# Altium PCB HW_ADHERENT_NFC_R1.PcbDoc
Units mm, origin at the board's own origin, x right, y up, seen from the top; angles counter-clockwise.
Board outline 60 x 46 mm, 4 copper layers (Top Layer, Int1 (GND), Int2 (PWR), Bottom Layer), stack 1.369 mm thick; 115 components, 65 nets, 328 pads, 0 vias.
Unrouted connection lines stored in the file: 235.
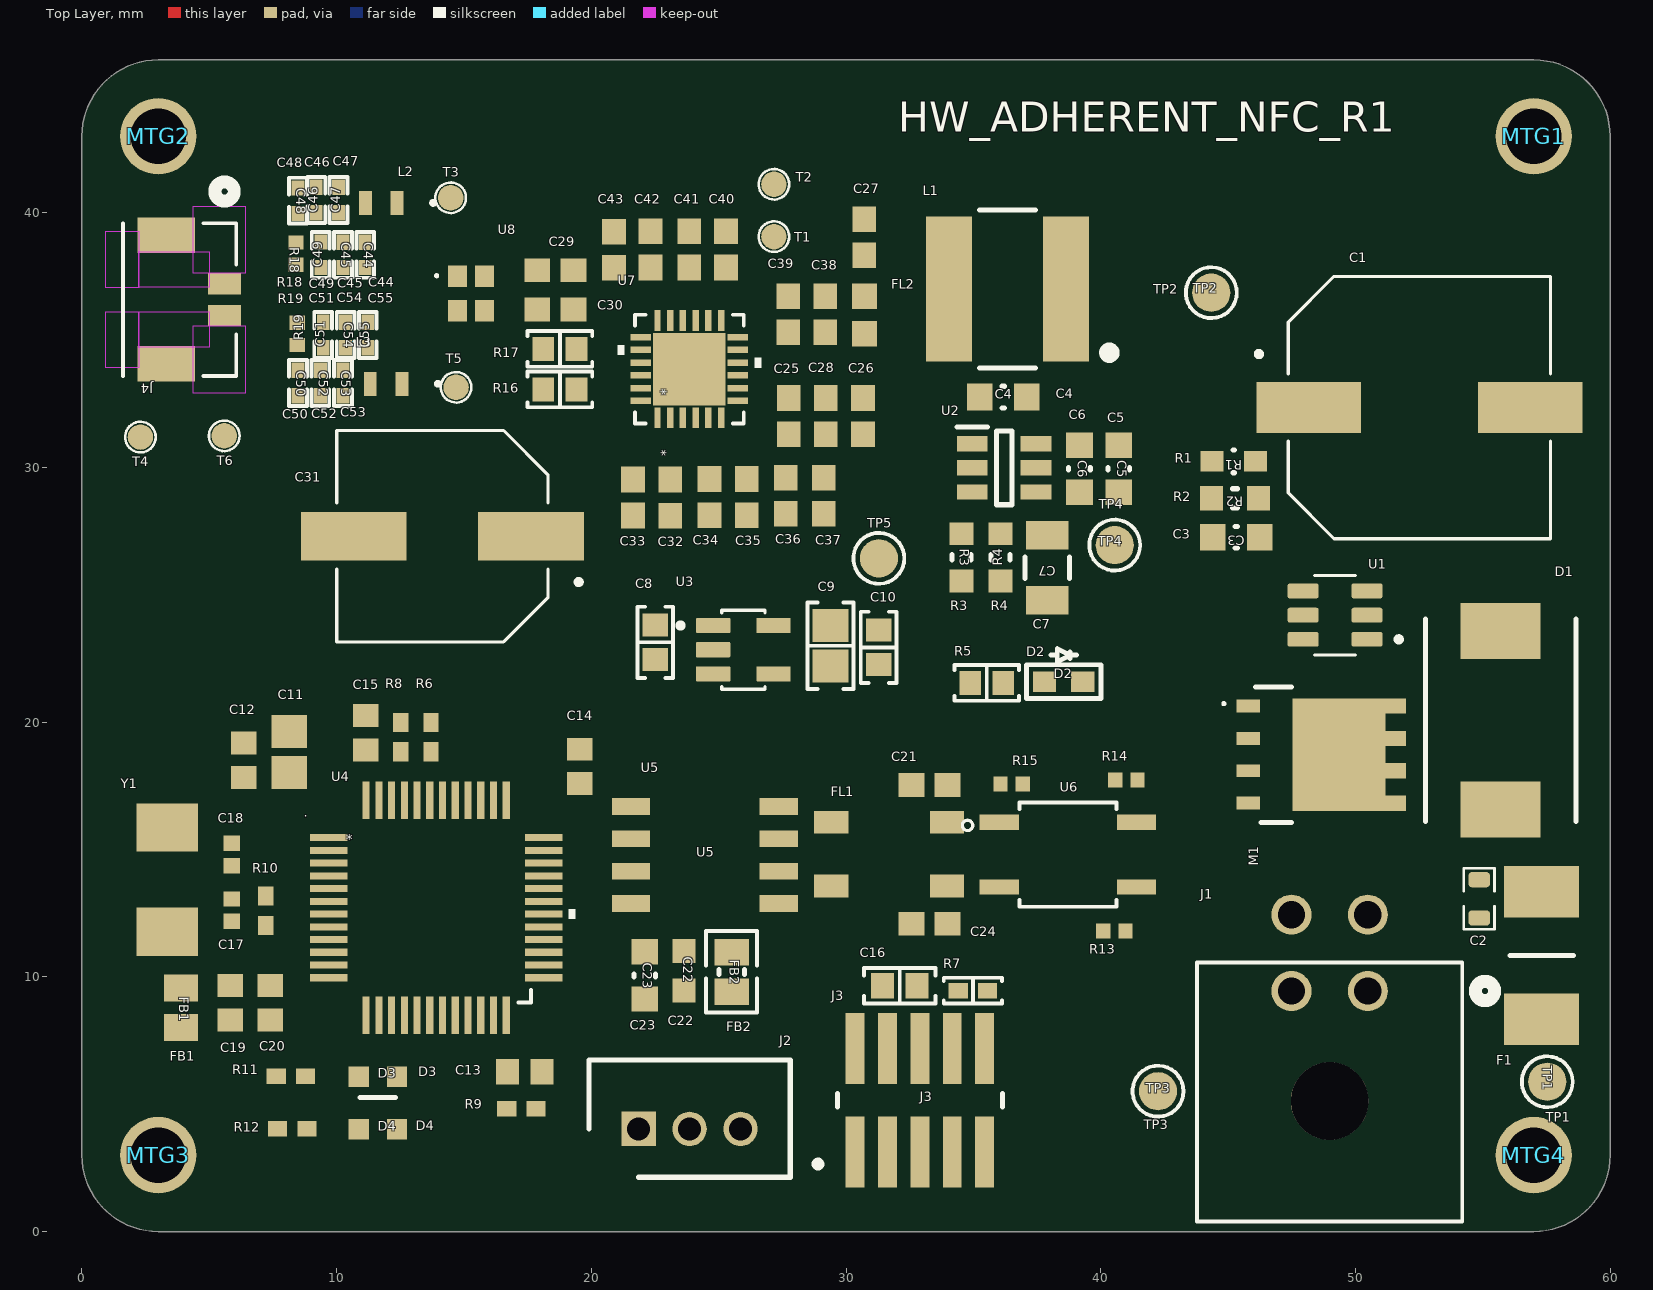
[diagram p0: Top Layer view]
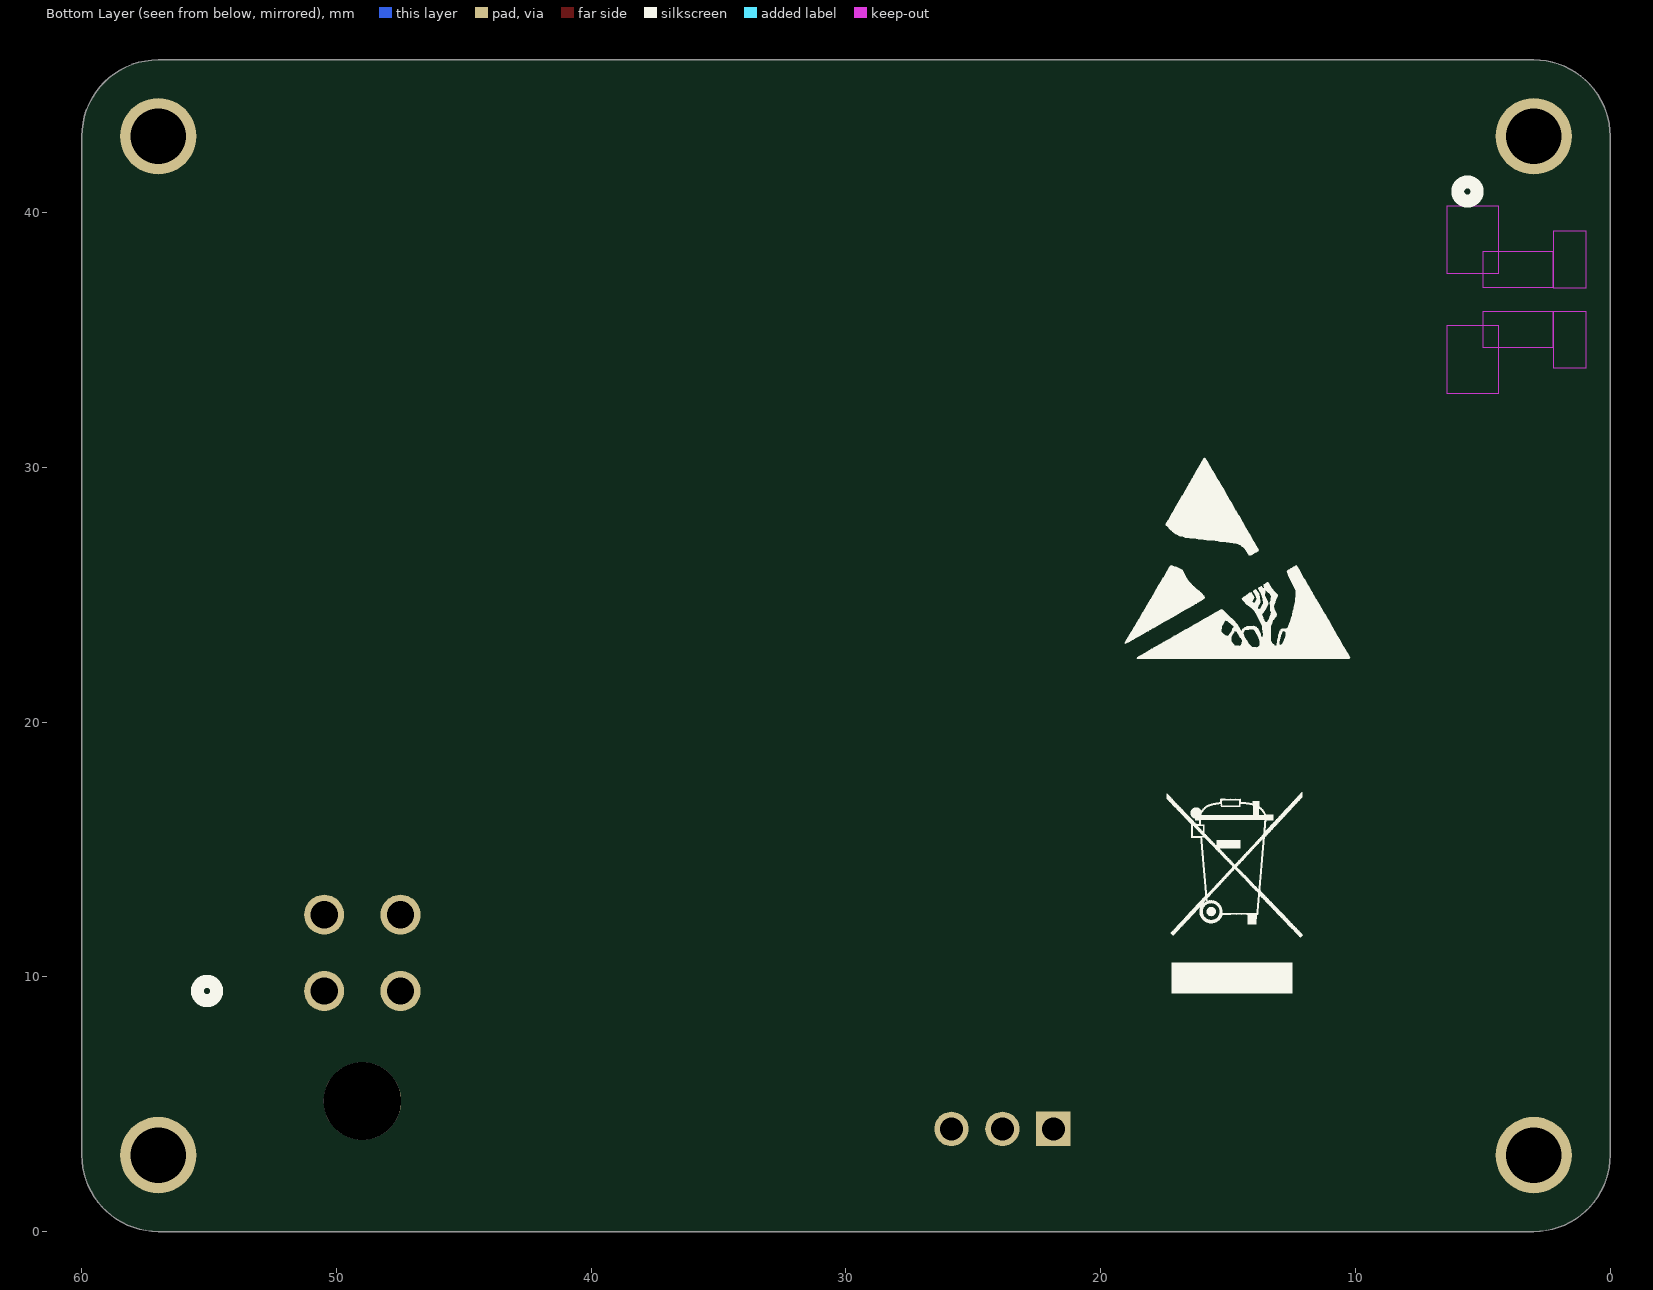
[diagram p1: Bottom Layer view, seen from below]
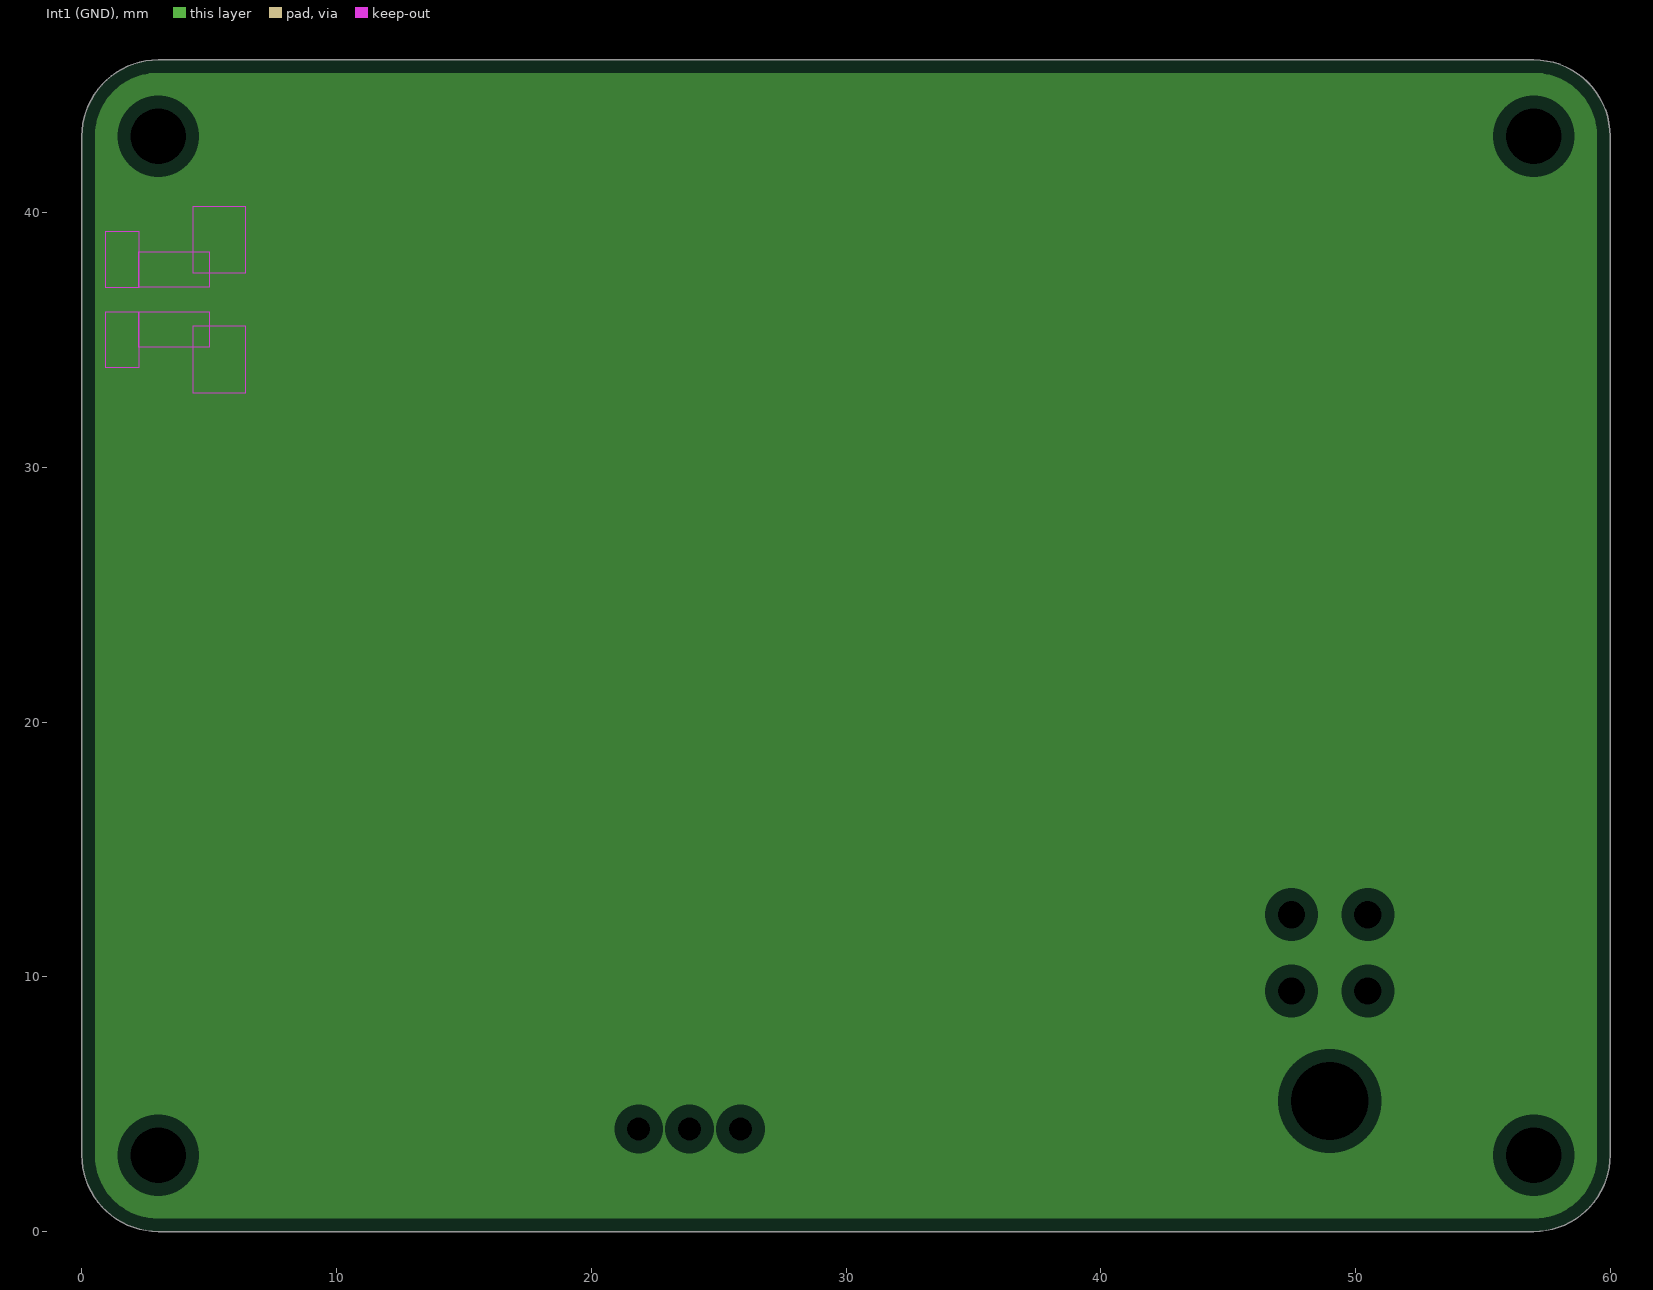
[diagram p2: Int1 (GND), clearances drawn from the general rule]
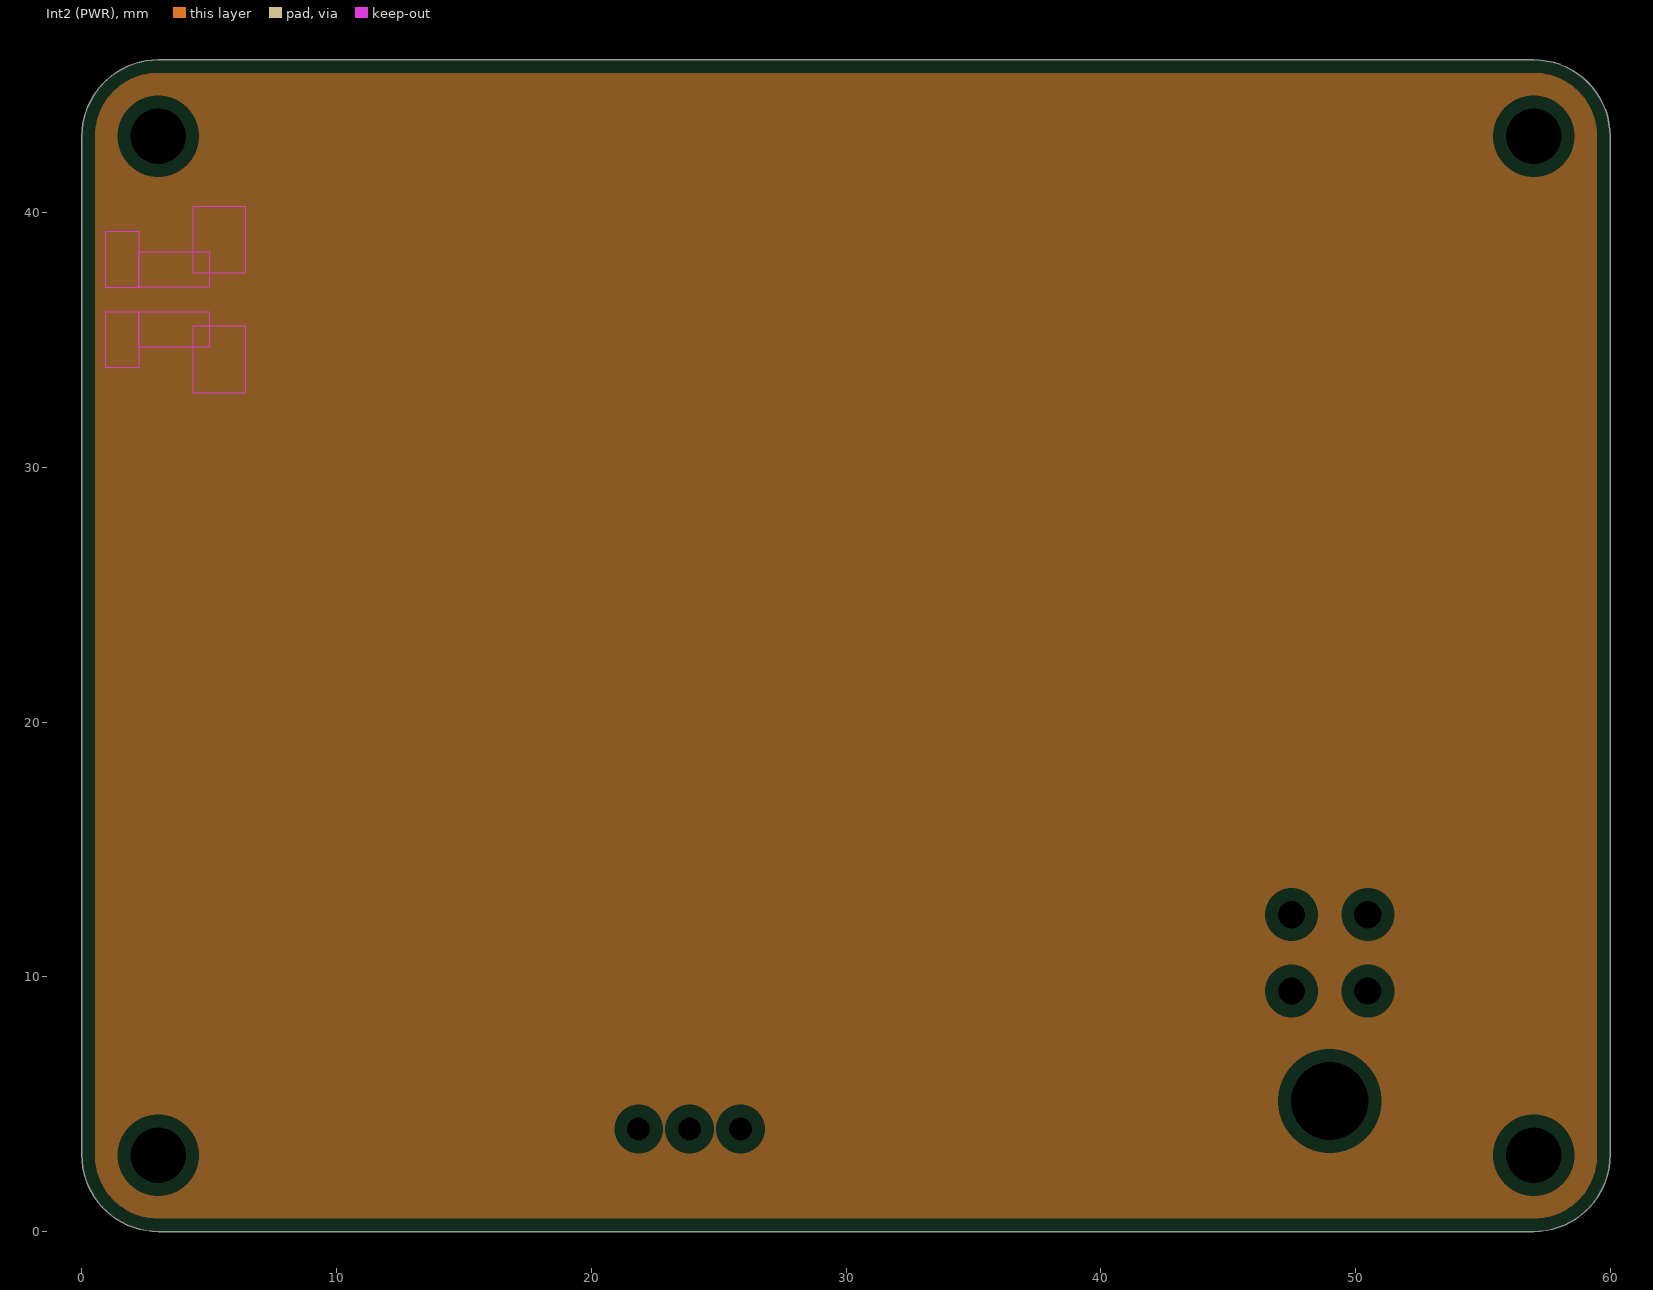
[diagram p3: Int2 (PWR), clearances drawn from the general rule]

## Layer stack, top to bottom
Top Solder: solder mask 0.0254, SM-001, Dk 4
Top Layer: signal copper 0.035
Dielectric 1: prepreg 0.1295, PP-017, Dk 4.3
Dielectric 2: prepreg 0.1295, PP-017, Dk 4.3
Int1 (GND): plane copper 0.035
Dielectric 3: core 0.7112, Core-039, Dk 4.8
Int2 (PWR): plane copper 0.035
Dielectric 4: prepreg 0.1295, PP-017, Dk 4.3
Dielectric 5: prepreg 0.1295, PP-017, Dk 4.3
Bottom Layer: signal copper 0.035
Bottom Solder: solder mask 0.0254, SM-001, Dk 4

## Board outline
0,3 0,43 cw(c3,43) 3,46 57,46 cw(c57,43) 60,43 60,3 cw(c57,3) 57,0 3,0 cw(c3,3)

## Design rules (kind name [scope] priority, off if disabled: settings)
BoardOutlineClearance [All] p1: gap=0.3 ignorepadtopadclearanceinfootprint=FALSE except(0: Arc-SplitContinuation Track-SplitContinuation SMDPad-SplitContinuation THPad-SplitContinuation Via-SplitContinuation Fill-SplitContinuation Poly-SplitContinuation Region-SplitContinuation Text-SplitContinuation)
Clearance CL_SMPS [InNetClass('SMPS_NOISY') and (IsTrack or IsArc or IsVia)] p1: gap=0.152 ignorepadtopadclearanceinfootprint=TRUE except(0.305: Arc-Poly Track-Poly SMDPad-Poly THPad-Poly Via-Poly Fill-Poly Poly-Poly Poly-Region Poly-Text Poly-Hole)
Clearance CL_CLOCK [InNetClass('CLOCK') and (IsTrack or IsArc or IsVia)] p2: gap=0.25 ignorepadtopadclearanceinfootprint=FALSE
Clearance CL_VIN [InNetClass('PWR_VIN') and (IsTrack or IsArc or IsVia)] p3: gap=0.25 ignorepadtopadclearanceinfootprint=FALSE
Clearance [All] p4: gap=0.15 ignorepadtopadclearanceinfootprint=FALSE
DiffPairsRouting DP_ZDIFF120 [InDifferentialPairClass('ZDIFF120')] p1: maxlimit=0.263 minlimit=0.263 mostfreqgap=0.263 toplayer_minwidth=0.127 toplayer_maxwidth=0.127 toplayer_prefwidth=0.127 bottomlayer_minwidth=0.127 bottomlayer_maxwidth=0.127 bottomlayer_prefwidth=0.127 impedanceprofiledriven=TRUE maxuncoupledlength=5
HoleSize [All] p1: absolutevalues=TRUE maxlimit=4 minlimit=0.2 maxpercent=80.000 minpercent=20.000
HoleToHoleClearance [All] p1: gap=0.5 allowstackedmicrovias=TRUE
MatchedLengths ML_ZDIFF120 [InDifferentialPairClass('ZDIFF120')] p1: tolerance=1 checknetsindiffpair=FALSE checkdiffpairvsdiffpair=TRUE checkxsignals=TRUE checkothers=TRUE
MinimumAnnularRing [All] p1: minimumring=0.13
MinimumSolderMaskSliver MS_U5 [InComponent('U5')] p1: minsoldermaskwidth=0.09
MinimumSolderMaskSliver [All] p2: minsoldermaskwidth=0.1
PlaneClearance [All] p1: clearance=0.508
PlaneConnect [All] p1: planeconnectstyle=Relief reliefexpansion=0.508 reliefentries=4 reliefconductorwidth=0.3 reliefairgap=0.3
PolygonConnect [All] p1: thpad.connectstyle=Relief thpad.reliefconductorwidth=0.3 thpad.reliefentries=4 thpad.polygonreliefangle="90 Angle" thpad.airgapwidth=0.3 smdpad.connectstyle=Direct smdpad.reliefconductorwidth=0.3 smdpad.reliefentries=4 smdpad.polygonreliefangle="90 Angle" smdpad.airgapwidth=0.3 via.connectstyle=Direct via.reliefconductorwidth=0.3 via.reliefentries=4 via.polygonreliefangle="90 Angle" via.airgapwidth=0.3
RoutingVias [All] p1: holewidth=0.3 width=0.6 viastyle="Through Hole" minholewidth=0.2 minwidth=0.45 maxholewidth=0.45 maxwidth=1
SilkToSilkClearance [All] p1: silktosilkclearance=0.15
SilkToSolderMaskClearance [IsPad] p1: minsilkscreentomaskgap=0.05 clearancetoexposedcopper=TRUE
SolderMaskExpansion [All] p1: expansion=0.05 istentingtop=FALSE
SupplyNets "Schematic Supply Nets_7" [InNet('+3V3')] p1: voltage=0.000
SupplyNets "Schematic Supply Nets_5" [InNet('GND')] p2: voltage=0.000
SupplyNets "Schematic Supply Nets_4" [InNet('+24V_VIN')] p3: voltage=0.000
SupplyNets "Schematic Supply Nets_2" [InNet('+5V_NFC')] p4: voltage=0.000
SupplyNets "Schematic Supply Nets_1" [InNet('+24V_PR')] p5: voltage=0.000
SupplyNets "Schematic Supply Nets" [InNet('+5V_MAIN')] p6: voltage=0.000
Width W_PWR_VIN [InNetClass('PWR_VIN')] p1: maxlimit=2 minlimit=0.4 preferedwidth=1 bottomlayer_minwidth=0.5 minimp=50.000000 maximp=50.000000 favimp=50.000000
Width W_PWR_5V [InNetClass('PWR_5V')] p2: maxlimit=2 minlimit=0.4 preferedwidth=0.6 minimp=50.000000 maximp=50.000000 favimp=50.000000
Width W_PWR_3V3 [InNetClass('PWR_3V3')] p3: maxlimit=1 minlimit=0.3 preferedwidth=0.4 minimp=50.000000 maximp=50.000000 favimp=50.000000
Width W_SMPS_SW [InNetClass('SMPS_NOISY')] p4: maxlimit=3 minlimit=0.254 preferedwidth=0.8 bottomlayer_minwidth=0.5 minimp=50.000000 maximp=50.000000 favimp=50.000000
Width W_CAN_F [InNetClass('CANF')] p5: maxlimit=0.285 minlimit=0.12 preferedwidth=0.127 minimp=50.000000 maximp=50.000000 favimp=50.000000
Width W_ZDIFF120 [InDifferentialPairClass('ZDIFF120')] p6: maxlimit=0.254 minlimit=0.09 preferedwidth=0.102 minimp=50.000000 maximp=50.000000 favimp=50.000000
Width [All] p7: maxlimit=0.5 minlimit=0.15 preferedwidth=0.2 minimp=50.000000 maximp=50.000000 favimp=50.000000
22 further rules are at their usual default settings.

## Classes and differential pairs
component class 06_NFC: C25 C26 C27 C28 C29 C30 C31 C32 C33 C34 C35 C36 C37 C38 C39 C40 C41 C42 C43 C44 C45 C46 C47 C48 C49 C50 C51 C52 C53 C54 C55 FL2 J4 L2 L3 R16 R17 R18 R19 T1 T2 T3 T4 T5 T6 U7 U8
net class CAN_BUS: CAN1_N CAN1_P
differential pair class ZDIFF120: CAN1
net class CAN1: CAN1_N CAN1_P
component class 05_MCU: C11 C12 C13 C14 C15 C16 C17 C18 C19 C20 D3 D4 FB1 J2 J3 MTG1 MTG2 MTG3 MTG4 R6 R7 R8 R9 R10 R11 R12 U4 Y1
component class 04_CAN: C21 C22 C23 C24 FB2 FL1 R13 R14 R15 U5 U6
component class 03_POWER: C1 C2 C3 C4 C5 C6 C7 C8 C9 C10 D1 D2 F1 J1 L1 M1 R1 R2 R3 R4 R5 TP1 TP2 TP3 TP4 TP5 U1 U2 U3
differential pair CAN1: +CAN1_P -CAN1_N

## Components (designator, comment, footprint, x,y, rotation, side; value= is the part's Value field where it differs from the comment)
C1 "47uF 80V" CAP_EEEFK1K470P 52.51,32.35 r0 top
C2 "CAP CER 0.22UF 50V X7R 0603" SMC0603 54.86,13.063 r90 top value="0.22uF 50V"
C3 "100nF 25V" CAP0603 45.32,27.257 r180 top value=100nF
C4 "0.1uF 16V" CAP0603 36.18,32.763 r0 top
C5 "1uF" CAP0603 40.708,29.943 r270 top
C6 "0.1uF 100V" CAP0603 39.165,29.943 r270 top
C7 "22uF 35V" CAP1206 37.9,26.06 r90 top
C8 "1 µF" "CAP 0603_1608" 22.51,23.133 r90 top
C9 "10 µF" "CAP 0805_2012" 29.39,23 r90 top
C10 "GCM188R71H104KA57J" "CAP 0603_1608" 31.28,22.935 r90 top
C11 "4.7 µF" "CAP 0805_2012" 8.137,18.828 r270 top
C12 "GCM188R71H104KA57J" "CAP 0603_1608" 6.36,18.503 r90 top
C13 "GCM188R71H104KA57J" "CAP 0603_1608" 17.39,6.273 r0 top
C14 "GCM188R71H104KA57J" "CAP 0603_1608" 19.55,18.26 r90 top
C15 "GCM188R71H104KA57J" "CAP 0603_1608" 11.149,19.585 r90 top
C16 "GCM188R71H104KA57J" "CAP 0603_1608" 32.11,9.65 r180 top
C17 "8.2 pF" "CAP 0402_1005" 5.885,12.617 r90 top
C18 "8.2 pF" "CAP 0402_1005" 5.885,14.799 r270 top
C19 "1 µF" "CAP 0603_1608" 5.82,8.983 r270 top
C20 "10000 pF" "CAP 0603_1608" 7.387,8.983 r270 top
C21 "47pF" CAPC1608X100N 33.28,17.53 r180 top
C22 "10uF" 0603_C 23.64,10.233 r90 top
C23 "100nF" CAP0603 22.095,10.054 r270 top value="100nF 50V"
C24 "47pF" CAPC1608X100N 33.28,12.08 r0 top
C25 "10uF" CAPC1608X100N 27.75,32.014 r90 top
C26 "10uF" CAPC1608X100N 30.67,32.014 r90 top
C27 "1uF 16V" CAPC1608X100N 30.72,39.035 r270 top
C28 "10000pF" CAPC1608X100N 29.2,32.014 r90 top
C29 "10pF 50V" CAPC1608X100N 18.589,37.74 r0 top
C30 "10pF 50V" CAPC1608X100N 18.589,36.2 r0 top
C31 "100uF 25V" CAP_25SVPF100M 14.155,27.3 r180 top
C32 "10000pF" CAPC1608X100N 23.1,28.815 r90 top
C33 "1uF 16V" CAPC1608X100N 21.64,28.819 r90 top
C34 "10000pF" CAPC1608X100N 24.64,28.835 r90 top
C35 "2.2uF" CAPC1608X100N 26.1,28.835 r90 top
C36 "10000pF" CAPC1608X100N 27.636,28.885 r90 top
C37 "2.2uF" CAPC1608X100N 29.13,28.885 r90 top
C38 "10000pF" CAPC1608X100N 29.18,36.015 r270 top
C39 "2.2uF" CAPC1608X100N 27.73,36.015 r270 top
C40 "0.1uF 16V" CAPC1608X100N 25.29,38.557 r270 top
C41 "2.2uF" CAPC1608X100N 23.85,38.557 r270 top
C42 "10000pF" CAPC1608X100N 22.328,38.557 r270 top
C43 "1uF 16V" CAPC1608X100N 20.89,38.545 r270 top
C44 "150pF 50V" CAPC1005X04L 11.125,38.345 r270 top
C45 "10pF 50V" CAPC1005X04L 10.255,38.345 r270 top
C46 "33pF 50V" CAPC1005X04L 9.205,40.495 r90 top
C47 "180pF 50V" CAPC1005X04L 10.075,40.495 r90 top
C48 "10pF 50V" CAPC1005X04L 8.485,40.47 r270 top
C49 "360pF 50V" CAPC1005X04L 9.375,38.345 r90 top
C50 "10pF 50V" CAPC1005X04L 8.485,33.31 r270 top
C51 "360pF 50V" CAPC1005X04L 9.475,35.2 r90 top
C52 "33pF 50V" CAPC1005X04L 9.365,33.31 r270 top
C53 "180pF 50V" CAPC1005X04L 10.255,33.31 r270 top
C54 "10pF 50V" CAPC1005X04L 10.355,35.2 r270 top
C55 "150pF 50V" CAPC1005X04L 11.225,35.2 r90 top
D1 "SMDJ33CA" DIONM7959X262N 55.7,20.073 r90 top
D2 "LTST-C191KRKT" LED0603 38.545,21.59 r0 top
D3 "LED RED CLEAR SMD" Lite-On_RED_0603 11.62,6.08 r0 top
D4 "LED RED CLEAR SMD" Lite-On_RED_0603 11.62,4.009 r0 top
F1 "0452002.MRL" FUSC6127X294N 57.31,10.833 r90 top
FB1 "BLM21PG121SN1D" INDC2012X11L 3.892,8.782 r90 top value=120R/0.55A
FB2 "BLM21PG121SN1D" INDC2012X11L 25.51,10.193 r90 top value=120R/0.55A
FL1 "ACT45B-510-2P-TL003" FIL_ACT45B-510-2P-TL003 31.69,14.82 r0 top
FL2 "BLM18PG221SN1D" BEADC1608X95N 30.73,35.984 r270 top
J1 "0430450400" CONN_SD-43045-001_04_MOL 50.487,9.443 r0 top
J2 "SWR201-NRTN-S03-SA-WH" SHDR3W50P0X200_1X3_790X460X630P 21.86,4.03 r0 top
J3 "CONN HEADER SMD 10POS 1.27MM" Samtec_0_MFG 32.9,5.15 r0 top
J4 "5055670271" CONN_505567_02_MOL 3.85,36.59 r90 top
L1 "18uH" WE-LQS_6045 36.34,37.003 r0 top
L2 "LQW18CNR47J0HD" IND_LQW18CN_0H_MUR 11.757,40.385 r180 top
L3 "LQW18CNR47J0HD" IND_LQW18CN_0H_MUR 11.945,33.28 r180 top
M1 "BSC028N06NS" BSC028N06NS 48.685,18.725 r270 top
MTG1 "Mounting Hole, 2MM" MTG-PTH-2MM#1 57,55 r0 top
MTG2 "Mounting Hole, 2MM" MTG-PTH-2MM#2 2.31,55.23 r90 top
MTG3 "Mounting Hole, 2MM" MTG-PTH-2MM#3 3,3 r90 top
MTG4 "Mounting Hole, 2MM" MTG-PTH-2MM#3 57,3 r90 top
R1 "RC0603FR-07100KL" FP-RC0603-0_55-MFG 45.225,30.24 r0 top
R2 "RES 10K OHM 1% 1/8W 0603" RES0603 45.27,28.787 r180 top value=10k
R3 "88.7k" RES0603 34.535,26.47 r270 top
R4 "22.1k" RES0603 36.065,26.47 r90 top
R5 "330 Ohms" "RES 0603_1608" 35.525,21.54 r0 top
R6 "10 kOhms" "RES 0402_1005" 13.703,19.41 r270 top
R7 "10 kOhms" "RES 0402_1005" 34.98,9.458 r180 top
R8 "10 kOhms" "RES 0402_1005" 12.515,19.41 r90 top
R9 "10 kOhms" "RES 0402_1005" 17.257,4.823 r180 top
R10 "0 Ohms" "RES 0402_1005" 7.221,12.591 r270 top
R11 "1 kOhms" "RES 0402_1005" 8.205,6.1 r180 top
R12 "1 kOhms" "RES 0402_1005" 8.26,4.03 r180 top
R13 "56 Ohms" RES_0402 40.535,11.8 r0 top
R14 "56 Ohms" RES_0402 41.01,17.73 r0 top
R15 "330 Ohms" RES_0402 36.5,17.57 r0 top
R16 "10 kOhms" "RES 0603_1608" 18.77,33.06 r180 top
R17 "10 kOhms" "RES 0603_1608" 18.77,34.65 r0 top
R18 "560mOhms" RES_0402 8.405,38.395 r270 top
R19 "560mOhms" RES_0402 8.455,35.24 r90 top
T1 "SMD" TEST_POINT 27.17,39.059 r90 top
T2 "SMD" TEST_POINT 27.17,41.115 r90 top
T3 "SMD" TEST_POINT 14.48,40.585 r0 top
T4 "SMD" TEST_POINT 2.3,31.19 r180 top
T5 "SMD" TEST_POINT 14.69,33.145 r0 top
T6 "SMD" TEST_POINT 5.59,31.24 r180 top
TP1 "Testpoint" SMD_1P5mm 57.53,5.88 r270 top
TP2 "Testpoint" SMD_1P5mm 44.34,36.86 r180 top
TP3 "Testpoint" SMD_1P5mm 42.25,5.51 r270 top
TP4 "Testpoint" SMD_1P5mm 40.55,26.95 r90 top
TP5 "Testpoint" SMD_1P5mm 31.29,26.43 r0 top
U1 "LM74700QDBVRQ1" SOT95P280X145-6N/LM74700QDBVRQ1 49.2,24.2 r180 top
U2 "LMR50410XDBVR" SOT95P280X145-6N/ 36.21,29.983 r0 top
U3 "AP2112K-3.3TRG1" SOT95P285X140-5N 25.97,22.843 r0 top
U4 "STM32F103C8T6" LQFP48_STM 13.91,12.713 r0 top
U5 "SN65HVD232DR" SOIC8 24.46,14.783 r0 top
U6 "CPC1014NTR" 4-SOP 38.71,14.8 r0 top
U7 "ST25R200-BMET" UFQFPN24_STM 23.85,33.86 r90 top
U8 "CS11337-27.12M" NX2016SA2712MHZEXS00ACS11337 15.28,36.825 r270 top
Y1 "ECS-80-8-30Q-VS-TR" XTAL_ECS-80-8-30Q-VS-TR 3.354,13.813 r90 top

## Footprints (in the part's own frame and the unit in brackets; to place one, negate y for a bottom-side part, rotate by r counter-clockwise, add the part's x,y. Pads: shape width x height; smd on the part's side, far side on the other; paste and mask are expansions set on the pad)
4-SOP [mm] "CPC1014NTR"
  rect 1.54x0.6 smd: 1(-2.695,1.27) 2(-2.695,-1.27) 3(2.695,-1.27) 4(2.695,1.27)
  silkscreen extent -4.14,-2.05 1.91,2.05, body extent -3.15,-2.15 3.05,2.15, height 2.09
0603_C [mil] "CHECKED BY DN_TN - 19FEB19"
  rect 37x36 smd mask+2.5: 1(-30.5,0) 2(30.5,0)
  body extent -31,-16 31,16, height 32
BEADC1608X95N [mm]
  rect 1x0.97 smd: 1(-0.735,0) 2(0.735,0)
  body extent -0.79,-0.42 0.81,0.38, height 0.8
BSC028N06NS [mm]
  rect 0.6x0.8 smd: D(-1.905,2.895) D(-0.635,2.895) D(0.635,2.895) D(1.905,2.895)
  rect 4.41x3.655 smd: D(0,0.667)
  rect 0.5x0.925 smd: G(1.905,-2.895) S(-1.905,-2.895) S(-0.635,-2.895) S(0.635,-2.895)
  silkscreen extent -2.66,-3.9 2.66,-1.2, body extent -2.64,-3.06 2.64,3.06, height 1.1
CAP0603 [mm] "CAPACITOR 0603"
  rect 1x1.05 smd: 1(-0.925,0) 2(0.925,0)
  silkscreen extent -0.05,-0.43 0.05,0.43, body extent -0.8,-0.4 0.8,0.4, height 0.8
CAP1206 [mm]
  rect 1.105x1.658 smd paste+0 mask+0: 1(-1.276,0) 2(1.276,0)
  silkscreen extent -0.42,-0.88 0.42,0.88, body extent -1.6,-0.8 1.6,0.8, height 1.4
"CAP 0402_1005" [mm] "Chip Capacitor, 2-Leads, Body 1.02x0.51mm, IPC Medium Density"
  rect 0.6x0.64 smd: 1(-0.44,0) 2(0.44,0)
  body extent -0.5,-0.26 0.5,0.26, height 0.52
"CAP 0603_1608" [mm] "Chip Capacitor, 2-Leads, Body 1.60x0.80mm, IPC Medium Density"
  rect 0.9x1 smd: 1(-0.675,0) 2(0.675,0)
  silkscreen extent -1.4,-0.7 1.4,0.7, body extent -0.8,-0.41 0.8,0.41, height 0.82
"CAP 0805_2012" [mm] "Chip Capacitor, 2-Leads, Body 2.00x1.20mm, IPC Medium Density"
  rect 1.3x1.4 smd: 1(-0.8,0) 2(0.8,0)
  silkscreen extent -1.7,-0.9 1.7,0.9, body extent -1,-0.64 1,0.64, height 1.26
CAP_25SVPF100M [mm]
  rect 4.15x1.9 smd: 1(-3.475,0) 2(3.475,0)
  silkscreen extent -5.45,-4.15 4.15,4.15, body extent -4.3,-4.15 4.7,4.15, height 7
CAP_EEEFK1K470P [mm]
  rect 4.1x2 smd: 1(-4.35,0) 2(4.35,0)
  silkscreen extent -6.4,-5.15 5.15,5.15, body extent -5.85,-5.15 5.85,5.15, height 10.2
CAPC1005X04L [mm] "Chip Capacitor, 2-Leads, Body 1.0x0.5mm, IPC High Density"
  rect 0.6x0.5 smd: 1(-0.5,0) 2(0.5,0)
  silkscreen extent -0.9,-0.35 0.9,0.35, body extent -0.5,-0.25 0.5,0.25, height 0.5
CAPC1608X100N [mm]
  rect 1.01x0.93 smd paste+0 mask+0.102: 1(-0.709,0) 2(0.709,0)
  body extent -0.79,-0.5 0.81,0.5, height 0.8
CONN_505567_02_MOL [mil]
  rect 33x51 smd paste+0 mask+4.02: 1(24.61,-69.07) 2(-24.61,-69.07)
  rect 55x89 smd paste+0 mask+4.02: 3(-99.41,21.28) 4(99.41,21.28)
  Keep-Out Layer region: -18.51,63.69 -105.51,63.69 -105.51,114.69 -18.51,114.69
  Keep-Out Layer region: 105.51,63.69 18.51,63.69 18.51,114.69 105.51,114.69
  Keep-Out Layer region: -18.76,-45.43 -73.76,-45.43 -73.76,63.57 -18.76,63.57
  Keep-Out Layer region: 73.76,-45.43 18.76,-45.43 18.76,63.57 73.76,63.57
  Keep-Out Layer region: -40.52,-100.81 -144.52,-100.81 -144.52,-20.81 -40.52,-20.81
  Keep-Out Layer region: 144.52,-100.81 40.52,-100.81 40.52,-20.81 144.52,-20.81
  silkscreen extent -118,-87 182,88, body extent -113,-80 113,85, height 154
CONN_SD-43045-001_04_MOL [mil]
  round 62 hole 42 mask+4.02: 1(0,0) 2(-118,0) 3(0,118) 4(-118,118)
  round 120 hole 120 unplated mask+0: ""(-59,-170)
  silkscreen extent -264,-356 196,44, body extent -260,-351 140,131, height 345
DIONM7959X262N [mm]
  rect 2.2x3.15 smd: 1(-3.5,0) 2(3.5,0)
  silkscreen extent -3.97,-2.95 3.97,2.95, body extent -3.97,-2.95 3.97,2.95, height 2.62
FIL_ACT45B-510-2P-TL003 [mm]
  rect 1.35x0.9 smd: 1(-2.275,1.25) 2(-2.275,-1.25) 3(2.275,-1.25) 4(2.275,1.25)
  body extent -2.25,-1.6 2.25,1.6, height 3
FP-RC0603-0_55-MFG [mm]
  rect 0.9x0.8 smd paste+0 mask+0: 1(-0.85,0) 2(0.85,0)
  silkscreen extent -0.03,-0.45 0.03,0.45, body extent -1.4,-0.55 1.4,0.55, height 0.25
FUSC6127X294N [mm]
  rect 2.02x2.95 smd: 1(-2.5,0) 2(2.5,0)
  silkscreen extent 0,-1.24 0,1.24, body extent -3.09,-1.33 3.01,1.36, height 2.7
IND_LQW18CN_0H_MUR [mil]
  rect 20x37 smd paste+0 mask+0: 1(-24.5,0) 2(24.5,0)
  silkscreen extent -83,-3 -77,3
INDC2012X11L [mm] "Chip Inductor, 2-Leads, Body 2.0x1.3mm, IPC High Density"
  rect 1.05x1.35 smd: 1(-0.775,0) 2(0.775,0)
  body extent -1,-0.63 1,0.63, height 1.25
LED0603 [mil] "LED0603"
  rect 36x32 smd: 1(-29.5,0) 2(29.5,0)
  silkscreen extent -58,-26 58,51, body extent -32,-16 32,16, height 43
Lite-On_RED_0603 [mm]
  rect 0.8x0.8 smd paste+0 mask+0: 1(-0.75,0) 2(0.75,0)
  silkscreen extent -0.7,-0.82 0.7,-0.82, body extent -0.8,-0.4 0.8,0.4, height 0.45
LQFP48_STM [mil]
  rect 58x11 smd paste+0 mask+0: 1(-166,108.27) 2(-166,88.58) 3(-166,68.9) 4(-166,49.21) 5(-166,29.53) 6(-166,9.84) 7(-166,-9.84) 8(-166,-29.53) 9(-166,-49.21) 10(-166,-68.9) 11(-166,-88.58) 12(-166,-108.27) 25(166,-108.27) 26(166,-88.58) 27(166,-68.9) 28(166,-49.21) 29(166,-29.53) 30(166,-9.84) 31(166,9.84) 32(166,29.53) 33(166,49.21) 34(166,68.9) 35(166,88.58) 36(166,108.27)
  rect 11x58 smd paste+0 mask+0: 13(-108.27,-166) 14(-88.58,-166) 15(-68.9,-166) 16(-49.21,-166) 17(-29.53,-166) 18(-9.84,-166) 19(9.84,-166) 20(29.53,-166) 21(49.21,-166) 22(68.9,-166) 23(88.58,-166) 24(108.27,-166) 37(108.27,166) 38(88.58,166) 39(68.9,166) 40(49.21,166) 41(29.53,166) 42(9.84,166) 43(-9.84,166) 44(-29.53,166) 45(-49.21,166) 46(-68.9,166) 47(-88.58,166) 48(-108.27,166)
  silkscreen extent 127,-146 215,-2, body extent -181,-181 181,181, height 63
MTG-PTH-2MM#1 [mm]
  round 3 hole 2.175: 0(0,-12)
MTG-PTH-2MM#2 [mm]
  round 3 hole 2.175: 0(-12.23,-0.69)
MTG-PTH-2MM#3 [mm]
  round 3 hole 2.175: 0(0,0)
NX2016SA2712MHZEXS00ACS11337 [mm]
  rect 0.85x0.75 smd: 1(-0.675,-0.525) 2(0.675,-0.525) 3(0.675,0.525) 4(-0.675,0.525)
  silkscreen extent -0.75,-1.4 -0.65,-1.3, body extent -1.02,-0.82 1.02,0.82, height 0.6
RES0603 [mm]
  rect 0.9x0.95 smd: 1(-0.925,0) 2(0.925,0)
  silkscreen extent -0.1,-0.38 0.1,0.38, body extent -0.8,-0.4 0.8,0.4, height 0.5
"RES 0402_1005" [mm] "Chip Resistor, 2-Leads, Body 1.0x0.5mm, IPC Medium Density"
  rect 0.75x0.6 smd: 1(-0.575,0) 2(0.575,0)
  body extent -0.5,-0.25 0.5,0.25, height 0.35
"RES 0603_1608" [mm] "Chip Resistor, 2-Leads, Body 1.60x0.80mm, IPC Medium Density"
  rect 0.85x0.95 smd: 1(-0.65,0) 2(0.65,0)
  silkscreen extent -1.27,-0.7 1.27,0.7, body extent -0.8,-0.4 0.8,0.4, height 0.45
RES_0402 [mm]
  rect 0.56x0.6 smd: 1(-0.435,0) 2(0.435,0)
  body extent -0.5,-0.25 0.5,0.25, height 0.35
Samtec_0_MFG [mm]
  rect 0.74x2.79 smd paste+0 mask+0: 1(-2.54,-2.035) 2(-2.54,2.035) 3(-1.27,-2.035) 4(-1.27,2.035) 5(0,-2.035) 6(0,2.035) 7(1.27,-2.035) 8(1.27,2.035) 9(2.54,-2.035) 10(2.54,2.035)
  silkscreen extent -4.12,-2.62 3.24,0.27, body extent -3.34,-3.53 3.34,3.53, height 0.25
SHDR3W50P0X200_1X3_790X460X630P [mm]
  rect 1.35x1.35 hole 0.9: 1(0,0)
  round 1.35 hole 0.9: 2(2,0) 3(4,0)
  silkscreen extent -1.95,-1.9 5.95,2.7, body extent -1.95,-1.87 5.95,2.78, height 6.06
SMC0603 [mm]
  rrect50% 0.6x0.85 smd: 1(-0.75,0) 2(0.75,0)
  silkscreen extent -1.2,-0.6 1.2,0.6, body extent -0.8,-0.4 0.8,0.4, height 0.81
SMD_1P5mm [mm]
  round 1.5 smd paste-5: 1(0,0)
  silkscreen extent -1,-1 1,1
SOIC8 [mm]
  rect 1.5x0.65 smd: 1(-2.9,1.905) 2(-2.9,0.635) 3(-2.9,-0.635) 4(-2.9,-1.905) 5(2.9,-1.905) 6(2.9,-0.635) 7(2.9,0.635) 8(2.9,1.905)
  body extent -2.96,-2.5 2.96,2.5, height 1.75
SOT95P280X145-6N/ [mm]
  rect 1.2x0.6 smd: 1(-1.25,0.95) 2(-1.25,0) 3(-1.25,-0.95) 4(1.25,-0.95) 5(1.25,0) 6(1.25,0.95)
  silkscreen extent -1.85,-1.45 0.3,1.6, body extent -1.4,-1.45 1.4,1.45, height 1.45
SOT95P280X145-6N/LM74700QDBVRQ1 [mm]
  rrect25% 1.21x0.58 smd: 1(-1.255,0.95) 2(-1.255,0) 3(-1.255,-0.95) 4(1.255,-0.95) 5(1.255,0) 6(1.255,0.95)
  silkscreen extent -2.6,-1.56 0.8,1.56, body extent -1.4,-1.45 1.4,1.45, height 1.45
SOT95P285X140-5N [mm]
  rrect15% 1.35x0.6 smd: 1(-1.185,0.95) 2(-1.185,0) 3(-1.185,-0.95) 4(1.185,-0.95) 5(1.185,0.95)
  silkscreen extent -2.57,-1.55 0.85,1.55, body extent -1.4,-1.5 1.4,1.5, height 1.4
TEST_POINT [mm]
  round 1 smd: 1(0,0)
  silkscreen extent -0.6,-0.6 0.6,0.6
UFQFPN24_STM [mil]
  rect 32x10 smd paste+0 mask+0: 1(-75,49.25) 2(-75,29.55) 3(-75,9.85) 4(-75,-9.85) 5(-75,-29.55) 6(-75,-49.25) 13(75,-49.25) 14(75,-29.55) 15(75,-9.85) 16(75,9.85) 17(75,29.55) 18(75,49.25)
  rect 10x32 smd paste+0 mask+0: 7(-49.25,-75) 8(-29.55,-75) 9(-9.85,-75) 10(9.85,-75) 11(29.55,-75) 12(49.25,-75) 19(49.25,75) 20(29.55,75) 21(9.85,75) 22(-9.85,75) 23(-29.55,75) 24(-49.25,75)
  rect 112x112 smd paste+0 mask+0: 25(0,0)
  silkscreen extent -84,-111 84,111, body extent -79,-79 79,79, height 22
WE-LQS_6045 [mm]
  rect 1.8x5.7 smd paste+0 mask+0.102: 1(2.3,0) 2(-2.3,0)
  silkscreen extent -1.1,-3.1 4.2,3.1, body extent -3.01,-2.98 2.99,3.02, height 4.5
XTAL_ECS-80-8-30Q-VS-TR [mm]
  rect 1.9x2.4 smd: 1(-2.05,0) 2(2.05,0)
  body extent -2.5,-1.6 2.5,1.6, height 1.1

## Part data
C1: library part EEE-FK1K470P, "47 µF 80 V Aluminum Electrolytic Capacitors Radial, Can - SMD 2000 Hrs @ 105°C", manufacturer="Panasonic Industry", Supplier="Digi; PCE3831DKR-ND"
C2: library part CAP0603_0.22UF_50V, "0.22 µF ±10% 50V Ceramic Capacitor X7R 0603 (1608 Metric)", Manufacturer Part Number=GCM188R71H224KA64D, Order Code="DIGI: 490-5402-2-ND"
C3: library part CAP0603_100nF, "0.1 µF ±10% 50V Ceramic Capacitor X7R 0603 (1608 Metric)", LCSC Part Number=C1590, Manufacturer Part Number=CL10B104KA8NNNC
C4: library part C0603C104M4RACTU, "0.1 µF ±20% 16V Ceramic Capacitor X7R 0603 (1608 Metric)", Manifacturer=KEMET, Supplier="Digi; 399-C0603C104M4RACTUDKR-ND"
C5: library part MSASU168SB5105MTNA01, "CAP CER 1UF 50V X5R 0603", manufacturer="Taiyo Yuden", Supplier=587-MSASU168SB5105MTNA01DKR-ND
C6: library part GRM188R72A104KA35D, "CAP CER 0.1UF 100V X7R 0603", Manifacturer="Murata Electronics", Supplier="Digi; 490-3285-6-ND"
C7: library part CAP1206_22uF_35V, "22 µF ±20% 35V Ceramic Capacitor X5R 1206 (3216 Metric)", Manufacturer Part Number=C3216X5R1V226M160AC, Order Code="DIGI : 445-180362-1-ND"
C8 C19: library part GMC10X7R105K25NT, "CAP0603 X7R 1UF 10% 25V", Device Package="0603 (1608 Metric)", manufacturer="Cal-Chip Electronics, Inc.", Operating Temperature="-55°C ~ 125°C", Supplier Part Number 1=4713-GMC10X7R105K25NTCT-ND, Temperature Coefficient=X7R, Tolerance=±10%, Voltage - Rated=25V, Applications="General Purpose", Capacitance="1 µF", componentlink1description=Datasheet, componentlink1url=https://calchip.com/wp-content/uploads/2023/05/gmc_series.pdf, componentlink2description="DigiKey Link", componentlink2url=https://www.digikey.com/en/products/detail/cal-chip-electronics-inc/GMC10X7R105K25NT/22461338, Lifecycle Status=Active, Minimum Order=1, Mounting Type="Surface Mount, MLCC", Package / Case="0603 (1608 Metric)", packaging=TapeAndReel, Part Number=GMC10X7R105K25NT, partid=68086, price=0.01, series=GMC, Size / Dimension="0.063\" L x 0.031\" W (1.60mm x 0.80mm)", Supplier 1=DigiKey, Thickness (Max)="0.037\" (0.95mm)"
  C8: lastupdated="4/6/2026 7:18:33 PM"
  C19: lastupdated="6.04.2026 19:18:33"
C9: library part GRM21BR61H106KE43L, "CAP CER 10UF 50V X5R 0805", Device Package="0805 (2012 Metric)", manufacturer="Murata Electronics", Operating Temperature="-55°C ~ 85°C", Supplier Part Number 1=490-18663-1-ND, Temperature Coefficient=X5R, Tolerance=±10%, Voltage - Rated=50V, Applications="Mobile Devices Only", Capacitance="10 µF", componentlink1description=Datasheet, componentlink1url=https://search.murata.co.jp/Ceramy/image/img/A01X/G101/ENG/GRM21BR61H106KE43-01A.pdf, componentlink2description="DigiKey Link", componentlink2url=https://www.digikey.com/en/products/detail/murata-electronics/GRM21BR61H106KE43L/10326316, lastupdated="4/6/2026 7:32:58 PM", Lifecycle Status=Active, Minimum Order=1, Mounting Type="Surface Mount, MLCC", Package / Case="0805 (2012 Metric)", packaging=TapeAndReel, Part Number=GRM21BR61H106KE43L, Part Status=Active, partid=39284, price=0.04, series=GRM, Size / Dimension="0.079\" L x 0.049\" W (2.00mm x 1.25mm)", Supplier 1=DigiKey, Thickness (Max)="0.057\" (1.45mm)"
C10 C12 C13 C14 C15 C16: "CAP CER 0.1UF 50V X7R 0603", Capacitance="0.1 µF", Device Package="0603 (1608 Metric)", manufacturer="Murata Electronics", Operating Temperature="-55°C ~ 125°C", Ratings=AEC-Q200, Supplier Part Number 1=490-8020-1-ND, Temperature Coefficient=X7R, Tolerance=±10%, Voltage - Rated=50V, Applications=Automotive, componentlink1description=Datasheet, componentlink1url=https://psearch.en.murata.com/capacitor/product/GCM188R71H104KA57%23.pdf, componentlink2description="DigiKey Link", componentlink2url=https://www.digikey.com/en/products/detail/murata-electronics/GCM188R71H104KA57J/2591942, Lifecycle Status=Active, Minimum Order=1, Mounting Type="Surface Mount, MLCC", Package / Case="0603 (1608 Metric)", packaging=TapeAndReel, Part Number=GCM188R71H104KA57J, Part Status="Not For New Designs", partid=60442, price=0.03, series=GCM, Size / Dimension="0.063\" L x 0.031\" W (1.60mm x 0.80mm)", Supplier 1=DigiKey, Thickness (Max)="0.035\" (0.90mm)"
  C10: lastupdated="4/6/2026 7:22:36 PM"
  C12 C13 C14 C15 C16: lastupdated="6.04.2026 19:22:36"
C11: library part GRM21BZ71H475KE15K, "CAP CER 4.7UF 50V X7R 0805", Device Package="0805 (2012 Metric)", manufacturer="Murata Electronics", Operating Temperature="-55°C ~ 125°C", Supplier Part Number 1=490-GRM21BZ71H475KE15KCT-ND, Temperature Coefficient=X7R, Tolerance=±10%, Voltage - Rated=50V, Applications="General Purpose", Capacitance="4.7 µF", componentlink1description=Datasheet, componentlink1url=https://search.murata.co.jp/Ceramy/image/img/A01X/G101/ENG/GRM21BZ71H475KE15-01.pdf, componentlink2description="DigiKey Link", componentlink2url=https://www.digikey.com/en/products/detail/murata-electronics/GRM21BZ71H475KE15K/13904908, lastupdated="6.04.2026 19:31:51", Lifecycle Status=Active, Minimum Order=1, Mounting Type="Surface Mount, MLCC", Package / Case="0805 (2012 Metric)", packaging=TapeAndReel, Part Number=GRM21BZ71H475KE15K, Part Status=Active, partid=39591, price=0.17, series=GRM, Size / Dimension="0.079\" L x 0.049\" W (2.00mm x 1.25mm)", Supplier 1=DigiKey, Thickness (Max)="0.057\" (1.45mm)"
C17 C18: library part GMC04CG8R2J25NT, "CAP0402 COG 8.2PF 5% 25V", Device Package="0402 (1005 Metric)", manufacturer="Cal-Chip Electronics, Inc.", Operating Temperature="-55°C ~ 125°C", Supplier Part Number 1=4713-GMC04CG8R2J25NTCT-ND, Temperature Coefficient="C0G, NP0", Tolerance=±5%, Voltage - Rated=25V, Applications="General Purpose", Capacitance="8.2 pF", componentlink1description=Datasheet, componentlink1url=https://calchip.com/wp-content/uploads/2025/05/GMC-Series-3.pdf, componentlink2description="DigiKey Link", componentlink2url=https://www.digikey.com/en/products/detail/cal-chip-electronics-inc/GMC04CG8R2J25NT/27784357, Features="General Purpose", lastupdated="6.04.2026 19:06:51", Lifecycle Status=Active, Minimum Order=1, Mounting Type="Surface Mount, MLCC", Package / Case="0402 (1005 Metric)", packaging=TapeAndReel, Part Number=GMC04CG8R2J25NT, partid=61382, price=0.07, series=GMC, Size / Dimension="0.039\" L x 0.020\" W (1.00mm x 0.50mm)", Supplier 1=DigiKey, Thickness (Max)="0.022\" (0.55mm)"
C20: library part C0603C103K4RECTU, "CAP CER 0603 10NF 16V X7R 10%", Device Package="0603 (1608 Metric)", manufacturer=KEMET, Operating Temperature="-55°C ~ 125°C", Supplier Part Number 1=399-C0603C103K4RECTUCT-ND, Temperature Coefficient=X7R, Tolerance=±10%, Voltage - Rated=16V, Applications="ESD Protection", Capacitance="10000 pF", componentlink1description=Datasheet, componentlink1url=https://search.kemet.com/download/datasheet/C0603C103K4REC7867, componentlink2description="DigiKey Link", componentlink2url=https://www.digikey.com/en/products/detail/kemet/C0603C103K4RECTU/8643658, lastupdated="6.04.2026 19:17:55", Lifecycle Status=Active, Minimum Order=1, Mounting Type="Surface Mount, MLCC", Package / Case="0603 (1608 Metric)", packaging=TapeAndReel, Part Number=C0603C103K4RECTU, partid=66152, price=0.01, series="ESD SMD Comm X7R", Size / Dimension="0.063\" L x 0.031\" W (1.60mm x 0.80mm)", Supplier 1=DigiKey, Thickness (Max)="0.034\" (0.87mm)"
C21 C24: library part GMC10CG470F200NT, "47 pF ±1% 200V Ceramic Capacitor C0G, NP0 0603 (1608 Metric)", manufacturer="Cal-Chip Electronics, Inc.", MPN=GMC10CG470F200NT, Supplier=4713-GMC10CG470F200NTDKR-ND
C22 C25 C26: library part CAP1461, "CAP CER 10UF 25V X5R 0603", manufacturer="Murata Electronics North America", Manufacturer Part Number=GRM188R61E106MA73D, Supplier Part Number=490-7202-1-ND, Voltage=25V, Revision=1
C23: library part CAP0603_100nF, "CAP CER 0.1UF 50V X7R 0603", Order Code="DIGI : 399-5089-1-ND", P/N=C0603C104K5RACTU
C27 C33 C43: library part VJ0603G105KXJCW1BC, "Multilayer Ceramic Capacitors MLCC - SMD/SMT 0603 1.0uF 16volts X5R 10%"
C28 C32 C34 C36 C38 C42: library part C0603C103K4RECTU, "10000 pF ±10% 16V Ceramic Capacitor X7R 0603 (1608 Metric)", JLCPCB PART#=0603, manufacturer=KEMET, Supplier="Digi; 399-C0603C103K4RECTUDKR-ND"
C29 C30: library part C0603C100F5GACAUTO, "10 pF ±1% 50V Ceramic Capacitor C0G, NP0 0603 (1608 Metric)", manufacturer=KEMET, Supplier="Digi; 399-C0603C100F5GACAUTODKR-ND"
C31: library part 25SVPF100M, "100 µF 25 V Aluminum - Polymer Capacitors Radial, Can - SMD 24mOhm 5000 Hrs @ 105°C", JLCPCB PART#=C136279, manufacturer="Panasonic Industry", Supplier="Digi; P123675DKR-ND"
C35 C37 C39 C41: library part 0603X225K250CT, "2.2 µF ±10% 25V Ceramic Capacitor X5R 0603 (1608 Metric)", JLCPCB PART#=C237194, manufacturer="Walsin Technology Corporation", Supplier="Digi; 1292-0603X225K250CTDKR-ND"
C40: library part VJ0603Y104KXJAC, "0.1 µF ±10% 16V Ceramic Capacitor X7R 0603 (1608 Metric)", manufacturer="Vishay Vitramon", Supplier="Digi; 720-1377-6-ND"
C44 C55: library part GMC04CG151G50NT, "150 pF ±2% 50V Ceramic Capacitor C0G, NP0 0402 (1005 Metric)", manufacturer="Cal-Chip Electronics, Inc.", Supplier="Digi; 2571-GMC04CG151G50NTTR-ND"
C45 C48 C50 C54: library part GMC04CG100G50NT, "CAP0402 COG 10PF 2% 50V", manufacturer="Cal-Chip Electronics, Inc.", Supplier="Digi; 4713-GMC04CG100G50NTDKR-ND"
C46 C52: library part GMC04CG330F50NT, "33 pF ±1% 50V Ceramic Capacitor C0G, NP0 0402 (1005 Metric)", manufacturer="Cal-Chip Electronics, Inc.", Supplier="Digi; 2571-GMC04CG330F50NTTR-ND"
C47 C53: library part GMC04CG181F50NT, "180 pF ±1% 50V Ceramic Capacitor C0G, NP0 0402 (1005 Metric)"
C49 C51: library part GMC04CG361J50NT, "360 pF ±5% 50V Ceramic Capacitor C0G, NP0 0402 (1005 Metric)", manufacturer="Cal-Chip Electronics, Inc.", Supplier="Digi; 4713-GMC04CG361J50NTDKR-ND"
D1: "53.3V Clamp 56.3A Ipp Tvs Diode Surface Mount DO-214AB (SMCJ)", manufacturer="Littelfuse Inc.", Supplier="Digi; SMDJ33CADKR-ND"
D2: library part LED_1, "LED RED CLEAR SMD", manufacturer="Lite-On Inc.", Supplier Part Number=160-1447-1-ND, Manufacturer Part Number=LTST-C191KRKT
D3 D4: library part LTST-C191KRKT_2, "Red 631nm LED Indication - Discrete 2V 0603 (1608 Metric)", Color="Red Clear", manufacturer="Lite-On Inc.", Manufacturer Part Number=LTST-C191KRKT, Order Code="DIGI: 160-1447-2-ND"
F1: "2 A 125 V 125 V Fuse Board Mount (Cartridge Style Excluded) Surface Mount 2-SMD, Square End Block", manufacturer="Littelfuse Inc.", Supplier="Digi; F2602DKR-ND"
FB1 FB2: library part FB0402-120R@100M-500mA, "Ferrite Bead, 120 Ohm @ 100MHz, 500mA, 250 mOhm Max", manufacturer=Murata, Manufacturer Part Number=BLM15AG121SN1D, Part number IPS=00000009954, Part number NEMS=100300099, Part number Norautron=265230631, Supplier Part Number 1=490-1005-1-ND, Artikkelnr Noca=33029317, Author=rsk, Component Class=Inductors, Component Status=Active, componentlink1description=Datasheet, componentlink1url=N.A., componentlink2description="Supplier link", componentlink2url=N.A., Footprint Doc=0402, HelpURL=http://search.murata.co.jp/Ceramy/image/img/PDF/ENG/L0110S0100BLM15A_SN.pdf, LatestRevisionDate=2014-01-10, Note="Chip EMIFIL Inductor Type Chip Ferrite Bead", Pad Count=2, Part Number=FB0402-120R@100M-500mA, partid=100300099, Published=2011-11-14, Supplier 1=Digi-Key, Supplier 2=Farnell, Supplier Part Number 2=151-5760
FL1: "51 ÂµH @ 100 kHz 2 Line Common Mode Choke Surface Mount 2.8 kOhms @ 10 MHz 200mA DCR 1Ohm", Package="Horizontal-4 TDK", Check_prices=https://www.snapeda.com/parts/ACT45B-510-2P-TL003/TDK/view-part/?ref=eda, MF=TDK, MP=ACT45B-510-2P-TL003, SnapEDA_Link=https://www.snapeda.com/parts/ACT45B-510-2P-TL003/TDK/view-part/?ref=snap
FL2: "220 Ohms @ 100 MHz 1 Power Line Ferrite Bead 0603 (1608 Metric) 1.4A 100mOhm", Package="1608 Murata", Availability=Unavailable, MF=Murata, MP=BLM18PG221SN1D, price=None, SnapEDA_Link=https://www.snapeda.com/parts/BLM18PG221SN1D/Murata/view-part/236838/?ref=snap
J1: "Connector Header Through Hole, Right Angle 4 position 0.118\" (3.00mm)", Manifacturer=MOLEX, Supplier="Digi; WM1814-ND"
J2: "Connector", Manufacturer_Name=Sullins, Datasheet Link=https://drawings-pdf.s3.amazonaws.com/11623.pdf, Height=6.3mm, Manufacturer_Part_Number=SWR201-NRTN-S03-SA-WH
J3: library part FTSH-105-01-F-DV-K, "Connector Header Surface Mount 10 position 0.050\" (1.27mm)", Manufacturer Part Number=FTSH-105-01-F-DV-K, Order Code="DIGI: SAM8796-ND"
J4: "Connector Header Surface Mount, Right Angle 2 position 0.049\" (1.25mm)", manufacturer=Molex, Supplier="Digi; WM17038DKR-ND"
L1: library part 74404064180, "18 µH Semi-Shielded Drum Core, Wirewound Inductor 2.2 A 81mOhm Nonstandard", Supplier=732-5553-6-ND
L2 L3: "Description", Manufacturer_Name=Murata, Copyright="Copyright (C) 2025 Ultra Librarian. All rights reserved.", Manufacturer_Part_Number=LQW18CNR47J0HD
M1: "MOSFET'ler N-Ch 60V 100A TDSON-8 OptiMOS 3"
MTG1 MTG2 MTG3 MTG4: library part MTG2MM
R1: library part CMP-2100-03662-2, "RES SMD 100K OHM 1% 1/10W 0603", Case Code (Imperial)=0603, Case Code (Metric)=1608, Max Operating Temperature=155°C, Max Power Dissipation=100mW, Min Operating Temperature=-55°C, Resistance=100kR, Resistance Tolerance=1%, Resistor Type="Thick Film", Temperature Coefficient=100ppm/°C, Voltage Rating=50V, Working Voltage=75V, Case/Package=0603, Construction=Rectangular, Depth=0.8mm, Features="Moisture Resistant", Height=0.45mm, Lead Free="Lead Free", Length=1.6mm, Military Standard=Not, Number of Pins=2, Number of Terminations=2, packaging="Tape and Reel", Power Rating=100mW, REACH SVHC="No SVHC", RoHS Compliant=Yes, series=RC, Technology="THICK FILM", Termination=SMD/SMT, Tolerance=1%, Voltage Rating (DC)=50V, Width=0.8mm
R2: library part RES0603_10K_%1_1, "10 kOhms ±1% 0.125W, 1/8W Chip Resistor 0603 (1608 Metric) Anti-Sulfur Thin Film", LCSC Manufacturer Part Number=MCT06030C1002FP500, LCSC Part Number=C161803, Manufacturer Part Number=RNCP0603FTD10K0, Order Code="Digi: RNCP0603FTD10K0TR-ND"
R3: library part CRCW060388K7FKEA, "88.7 kOhms ±1% 0.125W, 1/8W Chip Resistor 0603 (1608 Metric) Automotive AEC-Q200 Thick Film"
R4: library part RC0603FR-0722K1L, "22.1 kOhms ±1% 0.1W, 1/10W Chip Resistor 0603 (1608 Metric) Moisture Resistant Thick Film"
R5: library part CRGH0603F330R, "RES SMD 330 OHM 1% 1/5W 0603", Device Package="0603 (1608 Metric)", manufacturer="TE Connectivity Passive Product", Operating Temperature="-55°C ~ 155°C", Power (Watts)="0.2W, 1/5W", Supplier Device Package=0603, Supplier Part Number 1=A129541CT-ND, Temperature Coefficient=±100ppm/°C, Tolerance=±1%, componentlink1description=Datasheet, componentlink1url=https://www.te.com/commerce/DocumentDelivery/DDEController?Action=srchrtrv&DocNm=1773204-1&DocType=DS&DocLang=English, componentlink2description="DigiKey Link", componentlink2url=https://www.digikey.com/en/products/detail/te-connectivity-passive-product/CRGH0603F330R/5586961, Composition="Thick Film", Height - Seated (Max)="0.022\" (0.55mm)", lastupdated="2/9/2024 8:43:33 PM", Lifecycle Status=Active, Minimum Order=1, Number of Terminations=2, Package / Case="0603 (1608 Metric)", packaging=TapeAndReel, Part Number=CRGH0603F330R, Part Status=Active, partid=5733, price=0.01, Resistance="330 Ohms", series="CRGH, Neohm", Size / Dimension="0.063\" L x 0.031\" W (1.60mm x 0.80mm)", Supplier 1=DigiKey
R6 R7 R8 R9: library part RMCF0402FT10K0, "RES 10K OHM 1% 1/16W 0402", Device Package="0402 (1005 Metric)", manufacturer="Stackpole Electronics Inc", Operating Temperature="-55°C ~ 155°C", Power (Watts)="0.063W, 1/16W", Ratings=AEC-Q200, Supplier Device Package=0402, Supplier Part Number 1=RMCF0402FT10K0CT-ND, Temperature Coefficient=±100ppm/°C, Tolerance=±1%, componentlink1description=Datasheet, componentlink1url=https://www.seielect.com/catalog/sei-rmcf_rmcp.pdf, componentlink2description="DigiKey Link", componentlink2url=https://www.digikey.com/en/products/detail/stackpole-electronics-inc/RMCF0402FT10K0/1761433, Composition="Thick Film", Features="Automotive AEC-Q200", Height - Seated (Max)="0.016\" (0.40mm)", lastupdated="9.02.2024 20:29:20", Lifecycle Status=Active, Minimum Order=1, Number of Terminations=2, Package / Case="0402 (1005 Metric)", packaging=CutTape, Part Number=RMCF0402FT10K0, Part Status=Active, partid=20541, price=0.01, Resistance="10 kOhms", series=RMCF, Size / Dimension="0.039\" L x 0.020\" W (1.00mm x 0.50mm)", Supplier 1=DigiKey
R10: library part RMCF0402ZT0R00, "RES 0 OHM JUMPER 1/16W 0402", Device Package="0402 (1005 Metric)", manufacturer="Stackpole Electronics Inc", Operating Temperature="-55°C ~ 155°C", Power (Watts)="0.063W, 1/16W", Ratings=AEC-Q200, Supplier Device Package=0402, Supplier Part Number 1=RMCF0402ZT0R00CT-ND, Tolerance=Jumper, componentlink1description=Datasheet, componentlink1url=https://www.seielect.com/catalog/sei-rmcf_rmcp.pdf, componentlink2description="DigiKey Link", componentlink2url=https://www.digikey.com/en/products/detail/stackpole-electronics-inc/RMCF0402ZT0R00/1756905, Composition="Thick Film", Features="Automotive AEC-Q200", Height - Seated (Max)="0.016\" (0.40mm)", lastupdated="9.02.2024 20:29:34", Lifecycle Status=Active, Minimum Order=1, Number of Terminations=2, Package / Case="0402 (1005 Metric)", packaging=CutTape, Part Number=RMCF0402ZT0R00, Part Status=Active, partid=17627, price=0.01, Resistance="0 Ohms", series=RMCF, Size / Dimension="0.039\" L x 0.020\" W (1.00mm x 0.50mm)", Supplier 1=DigiKey
R11 R12: library part RMCF0402FT1K00, "RES 1K OHM 1% 1/16W 0402", Device Package="0402 (1005 Metric)", manufacturer="Stackpole Electronics Inc", Operating Temperature="-55°C ~ 155°C", Power (Watts)="0.063W, 1/16W", Ratings=AEC-Q200, Supplier Device Package=0402, Supplier Part Number 1=RMCF0402FT1K00CT-ND, Temperature Coefficient=±100ppm/°C, Tolerance=±1%, componentlink1description=Datasheet, componentlink1url=https://www.seielect.com/catalog/sei-rmcf_rmcp.pdf, componentlink2description="DigiKey Link", componentlink2url=https://www.digikey.com/en/products/detail/stackpole-electronics-inc/RMCF0402FT1K00/1761754, Composition="Thick Film", Features="Automotive AEC-Q200", Height - Seated (Max)="0.016\" (0.40mm)", lastupdated="9.02.2024 20:29:20", Lifecycle Status=Active, Minimum Order=1, Number of Terminations=2, Package / Case="0402 (1005 Metric)", packaging=CutTape, Part Number=RMCF0402FT1K00, Part Status=Active, partid=20544, price=0.01, Resistance="1 kOhms", series=RMCF, Size / Dimension="0.039\" L x 0.020\" W (1.00mm x 0.50mm)", Supplier 1=DigiKey
R13 R14: library part RMCF0402FT56R0, "56 Ohms ±1% 0.063W, 1/16W Chip Resistor 0402 (1005 Metric) Automotive AEC-Q200 Thick Film", Manİfacturer="Stackpole Electronics Inc", Supplier="Digi; RMCF0402FT56R0DKR-ND"
R15: library part RMCF0402FT330R, "330 Ohms ±1% 0.063W, 1/16W Chip Resistor 0402 (1005 Metric) Automotive AEC-Q200 Thick Film", Manifacturer="Stackpole Electronics Inc", Supplier="Digi; RMCF0402FT330RDKR-ND"
R16 R17: library part RNCS0603BKE10K0_1, "RES 10K OHM 0.1% 1/16W 0603", Device Package="0603 (1608 Metric)", manufacturer="Stackpole Electronics Inc", Operating Temperature="-55°C ~ 155°C", Part Number=RNCS0603BKE10K0, Power (Watts)="0.063W, 1/16W", Ratings=AEC-Q200, Supplier Device Package=0603, Supplier Part Number 1=RNCS0603BKE10K0CT-ND, Temperature Coefficient=±25ppm/°C, Tolerance=±0.1%, componentlink1description=Datasheet, componentlink1url=https://www.seielect.com/catalog/sei-rncs_rnch.pdf, componentlink2description="DigiKey Link", componentlink2url=https://www.digikey.com/en/products/detail/stackpole-electronics-inc/RNCS0603BKE10K0/1708836, Composition="Thin Film", Features="Anti-Corrosive, Automotive AEC-Q200, Moisture Resistant", Height - Seated (Max)="0.022\" (0.55mm)", lastupdated="2/9/2024 8:43:37 PM", Lifecycle Status=Active, Minimum Order=1, Number of Terminations=2, Package / Case="0603 (1608 Metric)", packaging=TapeAndReel, Part Status=Active, partid=4838, price=0.06, Resistance="10 kOhms", series=RNCS, Size / Dimension="0.061\" L x 0.031\" W (1.55mm x 0.80mm)", Supplier 1=DigiKey
R18 R19: library part RLP73K1ER56FTDF, "560 mOhms ±1% 0.125W, 1/8W Chip Resistor 0402 (1005 Metric) Current Sense Thick Film", manufacturer="TE Connectivity Passive Product", Supplier="Digi; A109550DKR-ND"
T1 T2 T3 T4 T5 T6: library part TP, DESIG="testing PAD", FAB=NA, PCB Footprint=test0_8-smd, REF=NA, VAL="NOT POPULATED"
TP1 TP2 TP3 TP4 TP5: library part "Testpoint / 1.0mm Pad / TP100", "Testpoint / 2.0mm Pad / TP200", DNP=DNP
U1: "OR Controller N+1 ORing Controller N-Channel 1:1 SOT-23-6"
U2: "Buck Switching Regulator IC Positive Adjustable 1V 1 Output 1A SOT-23-6", MPN=LMR50410XDBVR, Supplier=296-LMR50410XDBVRDKR-ND
U3: "Linear Voltage Regulator IC Positive Fixed 1 Output 600mA SOT-25", Package="SOT-753 Diodes Inc.", Availability="In Stock", Check_prices=https://www.snapeda.com/parts/AP2112K-3.3TRG1/Diodes+Inc./view-part/?ref=eda, MF="Diodes Inc.", MP=AP2112K-3.3TRG1, price=None, Purchase-URL=https://pricing.snapeda.com/search/part/AP2112K-3.3TRG1/?ref=eda, SnapEDA_Link=https://www.snapeda.com/parts/AP2112K-3.3TRG1/Diodes+Inc./view-part/?ref=snap
U4: "ARM Cortex-M3 32-bit MCU, 64 KB Flash, 20 KB Internal RAM, 37 I/Os, 48-pin LQFP, -40 to 85 degC, Tray", I/Os (High Current)=37, LCSC Part Number=C8734, Operating Frequency(F) (Processor speed) (MHz)=72, Supply Voltage(Vcc) min (V)=2, A/D Converter="2x12-bit (10 Channel)", componentlink1description="Manufacturer URL", componentlink1url=http://www.st.com/web/en/home.html, componentlink2description=Datasheet, componentlink2url=http://www.st.com/st-web-ui/static/active/en/resource/technical/document/datasheet/CD00161566.pdf, ComponentLink3Description="Package Specification", ComponentLink3URL=http://www.st.com/st-web-ui/static/active/en/resource/technical/document/datasheet/DM00058181.pdf, Core="ARM Cortex-M3", DatasheetVersion="Rev. 16", FLASH Size (Prog) (kB)=64, Internal RAM Size (kB)=20, LCSC Manufacturer Part Number=STM32F103C8T6, Manufacturer Part Number=STM32F103C8T6, Mounting Technology="Surface Mount", PackageDescription="48-Pin Low Profile Quad Flat Package, 7 x 7 mm Body, 0.5 mm Pitch", PackageReference=LQFP48, PackageVersion="Rev. 6, 06/2013", Packing=Tray
U5: "1Mbps Transceiver 3V~3.6V SOIC-8 CAN ICs ROHS", LCSC Part Number=C30530, Manufacturer Part Number=SN65HVD232DR
U6: "SSR RELAY SPST-NO 400MA 0-60V", manufacturer="IXYS Integrated Circuits Division", Supplier Part Number=CLA314CT-ND, Manufacturer Part Number=CPC1014NTR
U7: "Powerful general-purpose NFC reader for consumer and industrial applications", Manufacturer_Name=STMicroelectronics, Copyright="Copyright (C) 2025 Ultra Librarian. All rights reserved.", Manufacturer_Part_Number=ST25R200-BMET, RefDes=RefDes, Type=Type
U8: "27.12 MHz ±30ppm Crystal 6pF 60 Ohms 4-SMD, No Lead", Manıfacturer="NDK (NIHON DEMPA KOGYO CO., LTD)", Supplier=644-CS11337-27.12MDKR-ND
Y1: "8 MHz Â±30ppm Crystal 8pF 100 Ohms 2-SMD, No Lead", Package="SMD-2 ECS Inc.", Check_prices=https://www.snapeda.com/parts/ECS-80-8-30Q-VS-TR/ECS/view-part/?ref=eda, MF="ECS Inc.", MP=ECS-80-8-30Q-VS-TR, SnapEDA_Link=https://www.snapeda.com/parts/ECS-80-8-30Q-VS-TR/ECS/view-part/?ref=snap

## Nets (pads, with @x,y where several pads share a name; then routed paths per layer and width w, separated by ;. In a path a pad name is that pad's centre, name@x,y a point inside that pad or via, vN(x,y) a via of type N, cw(c..) or ccw(c..) an arc to the next point about the centre after c; other vN are vias at no path point)
+3V3: C9.2 C10.2 C11.2 C12.1 C13.1 C14.1 C15.1 C31.1 C32.2 C33.2 FB1.1 FB2.1 J3.1 R5.1 R6.1 R7.1 R16.2 TP5.1 U3.5 U4.1 U4.24 U4.36 U4.48 U7.3
+3V3_CAN: C22.2 C23.1 FB2.2 U5.3
+5V_MAIN: C7.2 C8.2 C27.2 FL2.1 L1.2 R3.2 TP4.1 U3.1 U3.3
+5V_NFC: C25.2 C26.2 C28.2 FL2.2 U7.7
+24V_PR: C1.1 C5.2 C6.2 M1.D R1.2 TP2.1 U1.4 U2.4 U2.5
+24V_VIN: F1.1 J1.1 TP1.1
BOOT0: R6.2 R8.1 U4.44
BOOT1: R9.2 U4.20
CAN1_N: C24.2 FL1.3 J1.4 R14.1
CAN1_P: C21.1 FL1.4 J1.3 R13.1
CAN_F_N: FL1.2 U5.6
CAN_F_P: FL1.1 U5.7
CAN_RX: U4.32 U5.4
CAN_TX: U4.33 U5.1
GND: C1.2 C3.1 C5.1 C6.1 C7.1 C8.1 C9.1 C10.1 C11.1 C12.2 C13.2 C14.2 C15.2 C16.2 C17.1 C18.1 C19.2 C20.2 C21.2 C22.1 C23.2 C24.1 C25.1 C26.1 C27.1 C28.1 C29.1 C30.1 C31.2 C32.1 C33.1 C34.1 C35.1 C36.1 C37.1 C38.1 C39.1 C40.1 C41.1 C42.1 C43.1 C44.2 C47.1 C48.1 C49.1 C50.2 C51.2 C53.1 C55.1 D1.1 D2.2 J1.2 J2.1 J3.3 J3.5 J3.9 R2.1 R4.1 R8.2 R9.1 R11.2 R12.2 R17.1 TP3.1 U1.2 U2.2 U3.2 U4.8 U4.23 U4.35 U4.47 U5.2 U6.2 U7.4 U7.11 U7.18 U7.25 U8.2 U8.4
LED_STAT: D3.2 U4.16
LED_USER: D4.2 U4.17
NetC2_1: C2.1 U1.1
NetC2_2: C2.2 D1.2 F1.2 M1.S U1.3 U1.6
NetC3_2: C3.2 R1.1 R2.2 U4.11
NetC4_1: C4.1 U2.1
NetC4_2: C4.2 L1.1 U2.6
NetC29_2: C29.2 U7.19 U8.1
NetC30_2: C30.2 U7.20 U8.3
NetC34_2: C34.2 C35.2 U7.5
NetC36_2: C36.2 C37.2 U7.6
NetC38_2: C38.2 C39.2 U7.8
NetC40_2: C40.2 C41.2 U7.14
NetC42_2: C42.2 C43.2 U7.15
NetC45_1: C45.1 C46.1 C48.2 C49.2 R18.1
NetC50_1: C50.1 C51.1 C52.1 C54.2 R19.1
NetD2_1: D2.1 R5.2
NetD3_1: D3.1 R11.1
NetD4_1: D4.1 R12.1
NetJ4_1: J4.1 R18.2 T4.1
NetJ4_2: J4.2 R19.2 T6.1
NetM1_G: M1.G U1.5
NetR3_1: R3.1 R4.2 U2.3
NetR13_2: R13.2 U6.3
NetR14_2: R14.2 U6.4
NetR15_1: R15.1 U6.1
NetR15_2: R15.2 U4.14
NetT1_1: T1.1 U7.12
NetT2_1: T2.1 U7.13
NFC_IRQ: U4.22 U7.1
NFC_RESET: R17.2 U4.21 U7.21
NRST: C16.1 J3.10 R7.2 U4.7
OSC_IN: C18.2 U4.5 Y1.2
OSC_OUT: R10.1 U4.6
OSC_OUT_Y: C17.2 R10.2 Y1.1
RFI1_ANT: C54.1 C55.2 U7.16
RFI2_ANT: C44.1 C45.2 U7.17
RFO1: L3.1 T5.1 U7.9
RFO1_ANT: C52.2 C53.2 L3.2
RFO2: L2.1 T3.1 U7.10
RFO2_ANT: C46.2 C47.2 L2.2
SPI2_CS_NFC: R16.1 U4.25 U7.22
SPI2_MISO: U4.27 U7.2
SPI2_MOSI: U4.28 U7.23
SPI2_SCLK: U4.26 U7.24
SWCLK: J3.4 U4.37
SWDIO: J3.2 U4.34
USART1_RX: J2.3 U4.31
USART1_TX: J2.2 U4.30
VDDA: C19.1 C20.1 FB1.2 U4.9
pads on no net: J1. J3.6 J3.7 J3.8 J4.3 J4.4 MTG1.0 MTG2.0 MTG3.0 MTG4.0 U3.4 U4.2 U4.3 U4.4 U4.10 U4.12 U4.13 U4.15 U4.18 U4.19 U4.29 U4.38 U4.39 U4.40 U4.41 U4.42 U4.43 U4.45 U4.46 U5.5 U5.8

## Polygon pours and split planes (outlines as drawn)
no net on Int1 (GND) (split plane): 3,45.49 57,45.49 57.016,45.491 57.217,45.482 57.433,45.454 57.645,45.407 57.852,45.342 58.053,45.258 58.246,45.158 58.429,45.041 58.602,44.909 58.762,44.762 58.909,44.602 59.041,44.429 59.158,44.246 59.258,44.053 59.342,43.852 59.407,43.645 59.454,43.433 59.482,43.217 59.491,43.016 59.49,43 59.49,3 59.491,2.984 59.482,2.783 59.454,2.567 59.407,2.355 59.342,2.148 59.258,1.947 59.158,1.754 59.041,1.571 58.909,1.398 58.762,1.238 58.602,1.091 58.429,0.959 58.246,0.842 58.053,0.742 57.852,0.658 57.645,0.593 57.433,0.546 57.217,0.518 57.016,0.509 57,0.51 3,0.51 2.984,0.509 2.783,0.518 2.567,0.546 2.355,0.593 2.148,0.658 1.947,0.742 1.754,0.842 1.571,0.959 1.398,1.091 1.238,1.238 1.091,1.398 0.959,1.571 0.842,1.754 0.742,1.947 0.658,2.148 0.593,2.355 0.546,2.567 0.518,2.783 0.509,2.984 0.51,3 0.51,43 0.509,43.016 0.518,43.217 0.546,43.433 0.593,43.645 0.658,43.852 0.742,44.053 0.842,44.246 0.959,44.429 1.091,44.602 1.238,44.762 1.398,44.909 1.571,45.041 1.754,45.158 1.947,45.258 2.148,45.342 2.355,45.407 2.567,45.454 2.783,45.482 2.984,45.491
no net on Int2 (PWR) (split plane): 3,45.49 57,45.49 57.016,45.491 57.217,45.482 57.433,45.454 57.645,45.407 57.852,45.342 58.053,45.258 58.246,45.158 58.429,45.041 58.602,44.909 58.762,44.762 58.909,44.602 59.041,44.429 59.158,44.246 59.258,44.053 59.342,43.852 59.407,43.645 59.454,43.433 59.482,43.217 59.491,43.016 59.49,43 59.49,3 59.491,2.984 59.482,2.783 59.454,2.567 59.407,2.355 59.342,2.148 59.258,1.947 59.158,1.754 59.041,1.571 58.909,1.398 58.762,1.238 58.602,1.091 58.429,0.959 58.246,0.842 58.053,0.742 57.852,0.658 57.645,0.593 57.433,0.546 57.217,0.518 57.016,0.509 57,0.51 3,0.51 2.984,0.509 2.783,0.518 2.567,0.546 2.355,0.593 2.148,0.658 1.947,0.742 1.754,0.842 1.571,0.959 1.398,1.091 1.238,1.238 1.091,1.398 0.959,1.571 0.842,1.754 0.742,1.947 0.658,2.148 0.593,2.355 0.546,2.567 0.518,2.783 0.509,2.984 0.51,3 0.51,43 0.509,43.016 0.518,43.217 0.546,43.433 0.593,43.645 0.658,43.852 0.742,44.053 0.842,44.246 0.959,44.429 1.091,44.602 1.238,44.762 1.398,44.909 1.571,45.041 1.754,45.158 1.947,45.258 2.148,45.342 2.355,45.407 2.567,45.454 2.783,45.482 2.984,45.491

## Silkscreen, mask and mechanical layers (free items; w line width, h text height)
Top Overlay:
  text "HW_ADHERENT_NFC_R1" at 32.05,42.794 h2
Bottom Overlay:
  drawing of 6 lines, arcs and shapes, not listed

## Text inside footprints (layer, text, board x,y; h text height)
U4: Top Overlay "*" at 10.379,15.078 h0.64
U7: Top Overlay "*" at 23.234,30.444 h0.64 r90; Top Overlay "*" at 23.234,32.831 h0.64 r90